# Altium PCB PWM DC Motor Speed Controller.PcbDoc
Units mil, origin at the board's own origin, x right, y up, seen from the top; angles counter-clockwise.
Board outline 2410 x 780 mil, 2 copper layers (Top Layer, Bottom Layer); 12 components, 10 nets, 32 pads, 0 vias.
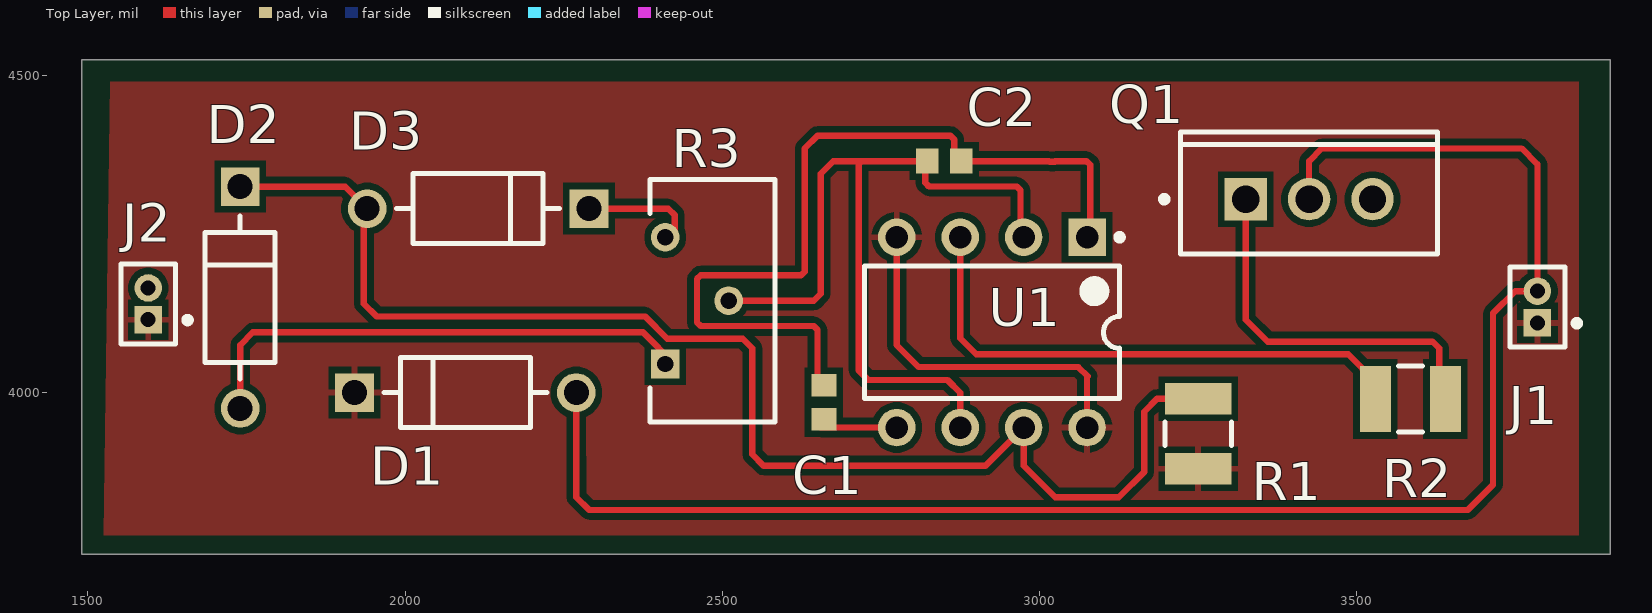
[diagram p0: Top Layer view]
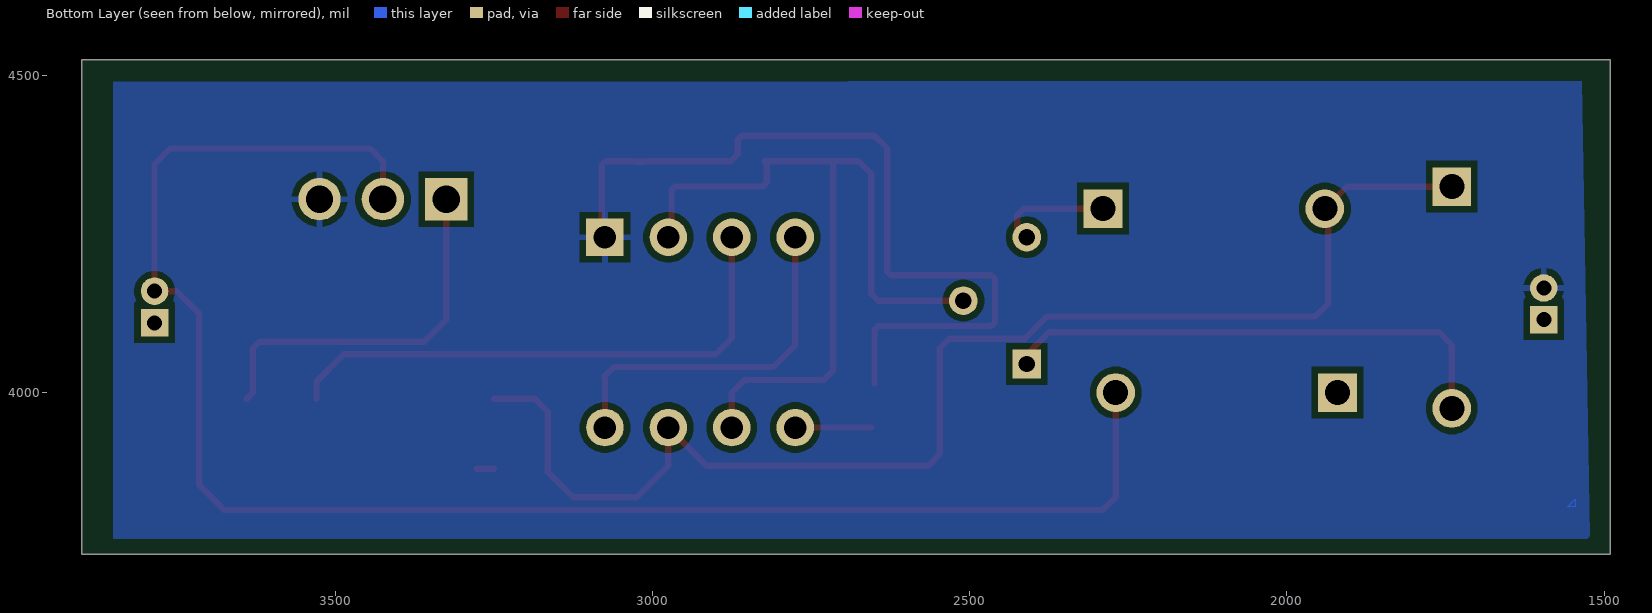
[diagram p1: Bottom Layer view, seen from below]
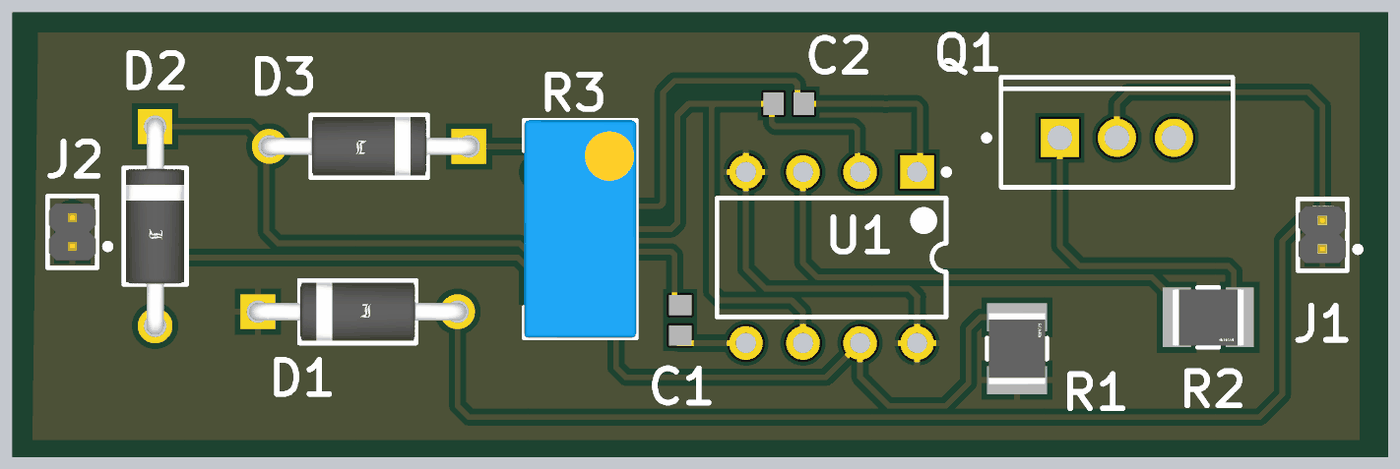
[diagram p2: 3D render of the assembled board from above, using the file's embedded part models]

## Layer stack, top to bottom
Top Solder: solder mask 0.4, Solder Resist, Dk 3.5
Top Layer: signal copper 1.4
Dielectric 1: dielectric 12.6, FR-4, Dk 4.8
Bottom Layer: signal copper 1.4
Bottom Solder: solder mask 0.4, Solder Resist, Dk 3.5

## Board outline
1490,3745 1490,4525 3900,4525 3900,3745

## Design rules (kind name [scope] priority, off if disabled: settings)
Clearance [All] p1: gap=10 ignorepadtopadclearanceinfootprint=FALSE except(0: Arc-Hole Track-Hole SMDPad-Hole THPad-Hole Via-Hole Fill-Hole Poly-Hole Region-Hole Text-Hole)
PolygonConnect [All] p1: connectstyle=Relief reliefconductorwidth=10 reliefentries=4 polygonreliefangle="90 Angle" airgapwidth=10
RoomDefinition "PWM DC Motor Speed Controller" [InComponentClass('PWM DC Motor Speed Controller')] p1: confinementstyle=ConfineIn formatcopy=TRUE lockcomponents=FALSE outline 10550,4527.5 13175,4527.5 13175,5092.5 10550,5092.5
RoutingVias [All] p1: holewidth=28 width=50 viastyle="Through Hole" minholewidth=28 minwidth=50 maxholewidth=28 maxwidth=50
SolderMaskExpansion [All] p1: expansion=4 istentingtop=FALSE
Width [All] p1: maxlimit=10 minlimit=10 preferedwidth=10
30 further rules are at their usual default settings.

## Components (designator, comment, footprint, x,y, rotation, side; value= is the part's Value field where it differs from the comment)
C1 "C0603C104K4RALTU" CAPC1608X87X35NL15T15 2660,3985 r270 top
C2 "C0603C104K4RALTU" CAPC1608X87X35NL15T15 2850,4365 r180 top
D1 "1N4007" FP-1N4007-MFG 2095,4000 r0 top value=15pF
D2 "1N4007" FP-1N4007-MFG 1740,4150 r270 top value=15pF
D3 "1N4007" FP-1N4007-MFG 2115,4290 r180 top value=15pF
J1 "M50-3530242" FP-M50-3530242-MFG 3785,4135 r90 top
J2 "M50-3530242" FP-M50-3530242-MFG 1595,4140 r90 top
Q1 "TIP122" ONSC-TO-220-3-221A-09 3425,4305 r90 top
R1 "ESR25JZPF1001" FP-ESR25-IPC_B 3250,3935.17 r270 top
R2 "ESR25JZPF1001" FP-ESR25-IPC_B 3584.83,3990 r180 top
R3 "T93YB103KT20" FP-T93YB-MFG 2484.8,4145 r180 top
U1 "NE555P" P0008A 2925,4095 r270 top

## Footprints (in the part's own frame and the unit in brackets; to place one, negate y for a bottom-side part, rotate by r counter-clockwise, add the part's x,y. Pads: shape width x height; smd on the part's side, far side on the other; paste and mask are expansions set on the pad)
CAPC1608X87X35NL15T15 [mm] "Chip Capacitor, 2-Leads, Body 1.60x0.80mm, IPC Medium Density"
  rect 0.9x1 smd: 1(-0.675,0) 2(0.675,0)
  body extent -0.87,-0.48 0.87,0.47, height 0.87
FP-1N4007-MFG [mm]
  rect 1.55x1.55 hole 1 paste-1000 mask+0: 1(-4.44,0)
  round 1.55 hole 1 paste-1000 mask+0: 2(4.44,0)
  silkscreen extent -3.26,-1.4 3.26,1.4, body extent -5.32,-1.5 5.32,1.5, height 0.25
FP-ESR25-IPC_B [mil]
  rect 49.44x104.65 smd paste+0 mask+0: 1(-55.17,0) 2(55.17,0)
  silkscreen extent -19,-52 19,52, body extent -90,-62 90,62, height 10
FP-M50-3530242-MFG [mm]
  rect 1.1x1.1 hole 0.6 paste-1000 mask+0: 1(-0.635,0)
  round 1.1 hole 0.6 paste-1000 mask+0: 2(0.635,0)
  silkscreen extent -1.6,-1.7 1.6,1.1, body extent -1.62,-1.2 1.62,1.2, height 0.25
FP-T93YB-MFG [mm]
  rect 1.15x1.15 hole 0.65 paste-1000 mask+0: 1(1.9,2.54)
  round 1.15 hole 0.65 paste-1000 mask+0: 2(-0.64,0) 3(1.9,-2.54)
  silkscreen extent -2.5,-4.85 2.5,4.85, body extent -2.6,-4.95 2.6,4.95, height 0.25
ONSC-TO-220-3-221A-09 [mm] "FM, 3-Leads, Body 10.3x4.85mm, Pitch 2.54mm"
  rect 1.7x1.7 hole 1.1: 1(0,2.54)
  round 1.7 hole 1.1: 2(0,0) 3(0,-2.54)
  silkscreen extent -2.2,-5.15 2.7,5.92, body extent -2.18,-5.15 2.67,5.15, height 19.85
P0008A [mm] "DIP, 8-Leads, Body 10.15x6.6mm, Pitch 2.54mm"
  rect 1.5x1.5 hole 0.9: 1(-3.81,3.81)
  round 1.5 hole 0.9: 2(-3.81,1.27) 3(-3.81,-1.27) 4(-3.81,-3.81) 5(3.81,-3.81) 6(3.81,-1.27) 7(3.81,1.27) 8(3.81,3.81)
  silkscreen extent -3.93,-5.1 2.65,5.24, body extent -3.95,-5.07 3.95,5.07, height 5.08

## Part data
C1 C2: library part CMP-2006-03059-1, Manufacturer=Kemet, Part Number=C0603C104K4RALTU
D1 D2 D3: library part CMP-123542-000001-1, "Rectifier diode 1000 V 1 A DO-41, ,", Capacitance=15pF, Forward Current=1A, Manufacturer=Diotec, Max Junction Temp=+175°C, Max Repetitive Reverse Voltage=1000V, Max Surge Forward Current=27A, Peak Reverse Current=5uA, Temperature="-50°C to +175°C", Temperature Range Low=-50°C, Automotive=No, Category=Diode, ComponentLink2Description=Datasheet, ComponentLink2URL=https://datasheet.octopart.com/1N4007-Diotec-datasheet-62346875.pdf, Device Class L1="Discrete Semiconductors", Device Class L2=Diodes, Device Class L3="Rectifier Diodes", Height=2.8mm, Ipc Land Pattern Name=DIOAD888W100L520D280, Lead Free=Yes, Manufacturer Part Number=1N4007, Octopart=https://octopart.com/1n4007-diotec-4040411, Package=1N4007, Reverse Voltage=1000V, RoHS=TRUE, Temperature Range High=+175°C
J1 J2: library part CMP-15831-000040-1, "CONN HEADER VERT 2POS 1.27MM"
Q1: library part CMP-1047-00126-1, "Plastic Medium-Power, Complementary Silicon Transistor, 3-Pin TO-220, Tube", Manufacturer="On Semiconductor", ComponentLink1Description="Manufacturer URL", ComponentLink1URL=http://www.onsemi.com/, ComponentLink2Description=Datasheet, ComponentLink2URL=http://www.onsemi.cn/pub_link/Collateral/TIP120-D.PDF, ComponentLink3Description="Package Specification", ComponentLink3URL=http://www.onsemi.com/pub_link/Collateral/221A-09.PDF, DatasheetVersion="Rev. 8", IC Continuous (A)=5, Mounting Technology="Through Hole", PackageDescription="3-Pin Flange Mount, Vertical Straight Lead, Body 9.97 x 4.445 mm, Pitch 2.54 mm", PackageReference=TO-220-3-221A-09, PackageVersion="Rev. AG, 09/2011", Packing=Tube, PartNumber=TIP122, Polarity=NPN, RoHS=FALSE
R1 R2: library part CMP-08839-005598-1, "1kΩ ±1% 0.66W 1210 Anti-Surge Chip Resistor AEC-Q200", Case/Package=1210, Max Operating Temperature=155°C, Max Power Dissipation=667mW, Min Operating Temperature=-55°C, Resistance=1kR, Resistor Type="Thick Film", Temperature Coefficient=100ppm/°C, Tolerance=1%, Features="Automotive AEC-Q200", Number of Terminations=2, Packaging="Tape and Reel", RoHS Compliant=Yes, Series=ESR
R3: library part CMP-00030-39738570-1, "T93YB103KT20 Resistor Trimmer, Cermet, 10 kOhm, ± 10%, 500 mW, 23 Turn, Multi Turn, Through Hole", Max Operating Temperature=125°C, Max Power Dissipation=500mW, Min Operating Temperature=-55°C, Resistance=10kΩ, Temperature Coefficient=100ppm/°C, Tolerance=10%, Voltage Rating=250V, Composition=Cermet, Depth=5mm, Height=9.8044mm, Lead Free="Lead Free", Length=9.7028mm, Military Standard=Not, Mount="PCB, Through Hole", NexarPartId=39738570, Number of Turns=21, Power Rating=500mW, Radiation Hardening=No, REACH SVHC=Unknown, RoHS=Compliant, Schedule B="8533400080, 8533400080", Taper=Linear, Termination=Pin, Voltage Rating (DC)=250V, Weight=820.009956mg, Width=5.0038mm
U1: library part CMP-2000-04954-1, "Precision Timer, 4.5 to 16 V, 0 to 70 degC, 8-Pin DIP, Pb-Free, Tube", Manufacturer=TexasInstruments, Maximum High Level Output Current=-200mA, Maximum Low Level Output Current=200mA, Operating Supply Voltage=5, Package=8PDIP, Package Description="8-Pin Double In-line Package, Body 9.59 x 6.35 mm, Pitch 2.54 mm", Package Reference=P8, Category=Timer, Datasheet URL=http://www.ti.com/general/docs/lit/getliterature.tsp?genericPartNumber=NE555&fileType=pdf, Datasheet Version="Rev. I, 09/2014", Manufacturer URL=http://www.ti.com/, Number of Internal Timers=1, Package URL=http://www.ti.com/lit/ml/mpdi001b/mpdi001b.pdf, Packaging=Rail/Tube, Rad Hard=No, Type=Standard

## Nets (pads, with @x,y where several pads share a name; then routed paths per layer and width w, separated by ;. In a path a pad name is that pad's centre, name@x,y a point inside that pad or via, vN(x,y) a via of type N, cw(c..) or ccw(c..) an arc to the next point about the centre after c; other vN are vias at no path point)
GND: C1.1 C2.1 J2.2 Q1.3 U1.1 | length 1324.9
  Top Layer w10: C1.1@2650,4014.12 2650,4099.14 2644.14,4105 2465.86,4105 2460,4110.86 2460,4179.14 2465.86,4185 2624.14,4185 2630,4190.86 2630,4385 2650,4405 2859.67,4405 2865.53,4399.14 2865.53,4376.05 C2.1 3015,4365 3015.86,4364.14 3024.14,4364.14 3025,4365 3074.14,4365 3080,4359.14 3080,4250 U1.1
NetC1_2: C1.2 U1.5 | length 119.6
  Top Layer w10: C1.2@2655.39,3945 U1.5
NetC2_2: C2.2 R3.2 U1.2 U1.6 | length 1328.5
  Top Layer w10: R3.2@2525,4145 2644.14,4145 2655,4155.86 2655,4345 2675,4365 2720,4365 ; U1.6 2875,4000 2855,4020 2730,4020 2715,4035 2715,4360 2720,4365 ; U1.2 2970,4250 2970,4319.14 2964.14,4325 2825.86,4325 2820,4330.86 2820,4361.57 C2.2 2720,4365
NetD1_2: D1.2 J1.2 Q1.2 | length 2628.1
  Top Layer w10: D1.2 2269.8,3900.2 2270,3900 2270,3835 2290,3815 3675,3815 3715,3855 3715,4125 3750,4160 J1.2 3785,4360 3760,4385 3445,4385 3425,4365 Q1.2
NetD2_1: D2.1 D3.2 R1.1 U1.7 | length 2111
  Top Layer w10: D2.1 1905.39,4324.8 D3.2 1935,4284.8 1935,4140 1955,4120 2378.28,4120 2413.28,4085 2532.43,4085 2547.36,4070.07 2547.36,3902.64 2565,3885 2915,3885 U1.7 2975,3885 3025,3835 3125,3835 3165,3875 3165,3970 3185.33,3990.33 R1.1
NetD2_2: D2.2 R3.1 | length 813.8
  Top Layer w10: D2.2 1740,4075 1760,4095 2375,4095 R3.1@2425,4045
NetD3_1: D3.1 R3.3 | length 174.3
  Top Layer w10: D3.1 2415,4290 2425,4280 R3.3@2425,4245
NetQ1_1: Q1.1 R2.1 | length 597.8
  Top Layer w10: Q1.1 3325,4115 3359.69,4080.31 3619.69,4080.31 3630,4070 3630,4000 R2.1
NetR2_2: R2.2 U1.3 | length 869.7
  Top Layer w10: U1.3 2875,4085.86 2900.54,4060.31 3486.96,4060.31 3529.67,4017.61 R2.2
VCC: D1.1 J1.1 J2.1 R1.2 U1.4 U1.8 | length 607.4
  Top Layer w10: D1.1@1915,3994.8 D1.1 ; U1.4 2775,4075 2809.69,4040.31 3061.4,4040.31 3075.86,4025.86 3075,4025 U1.8 ; R1.2 R1.2@3277.61,3880

## Polygon pours and split planes (outlines as drawn)
GND on Bottom Layer "GND_L02_P004" (solid, pour order 4): 1522.64,3769.68 3850,3769.68 3850,4490 1534.98,4491.89
GND on Bottom Layer "GND_L02_P006" (solid, pour order 6): 1545,3820 1557.27,3820 1545.21,3832.07
VCC on Top Layer "VCC_L01_P009" (solid, remove dead copper, pour order 9): 1535,4490 3850.07,4490 3850.07,3775 1525,3775

## Silkscreen, mask and mechanical layers (free items; w line width, h text height)
Mechanical 1:
  the board outline again, w3.94